# EAGLE board Platine final (EAGLE 9.7.0)
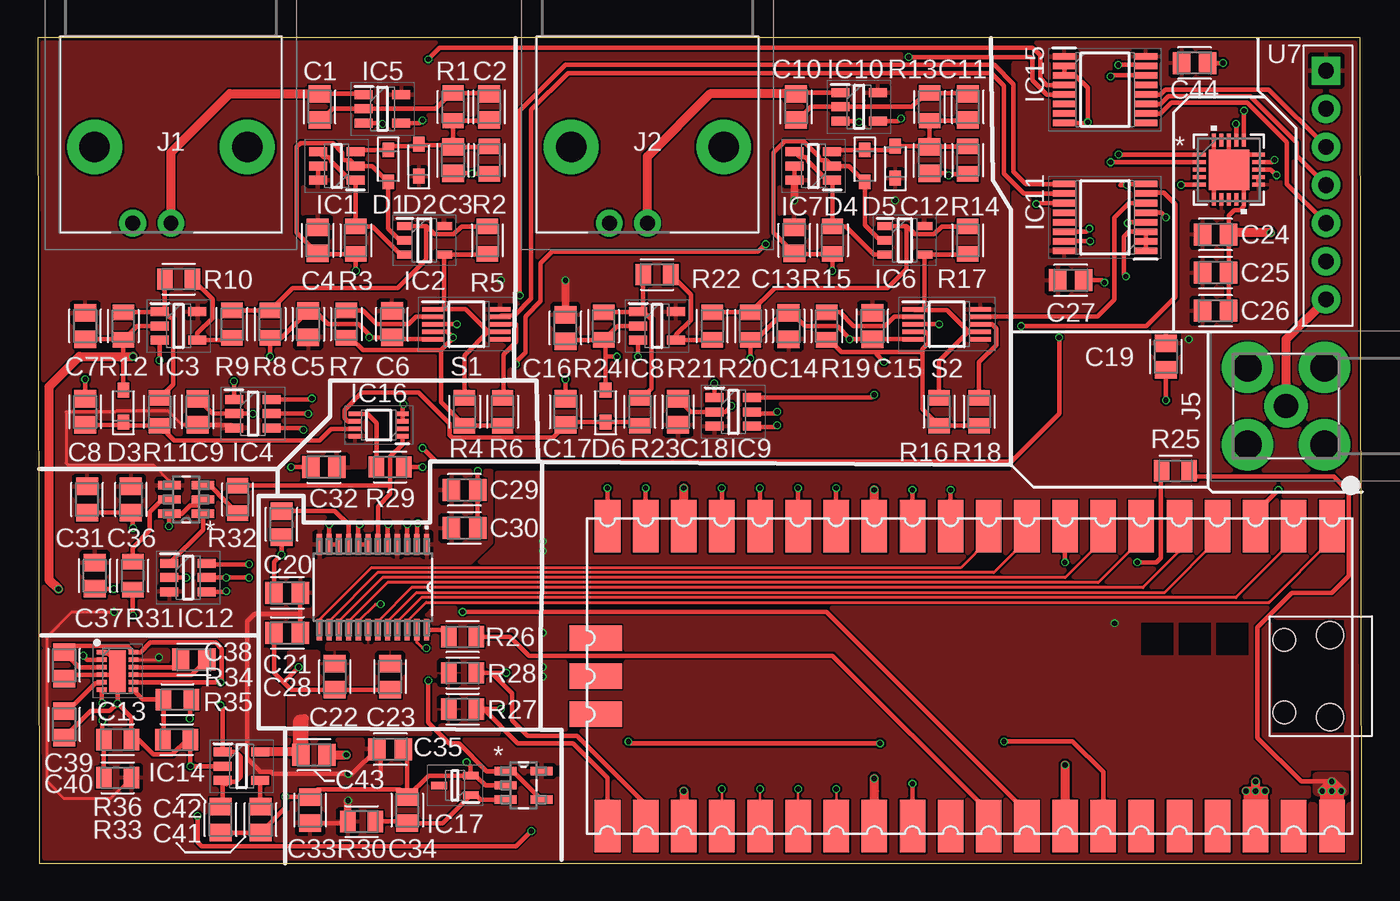
[diagram p0: board, top side]
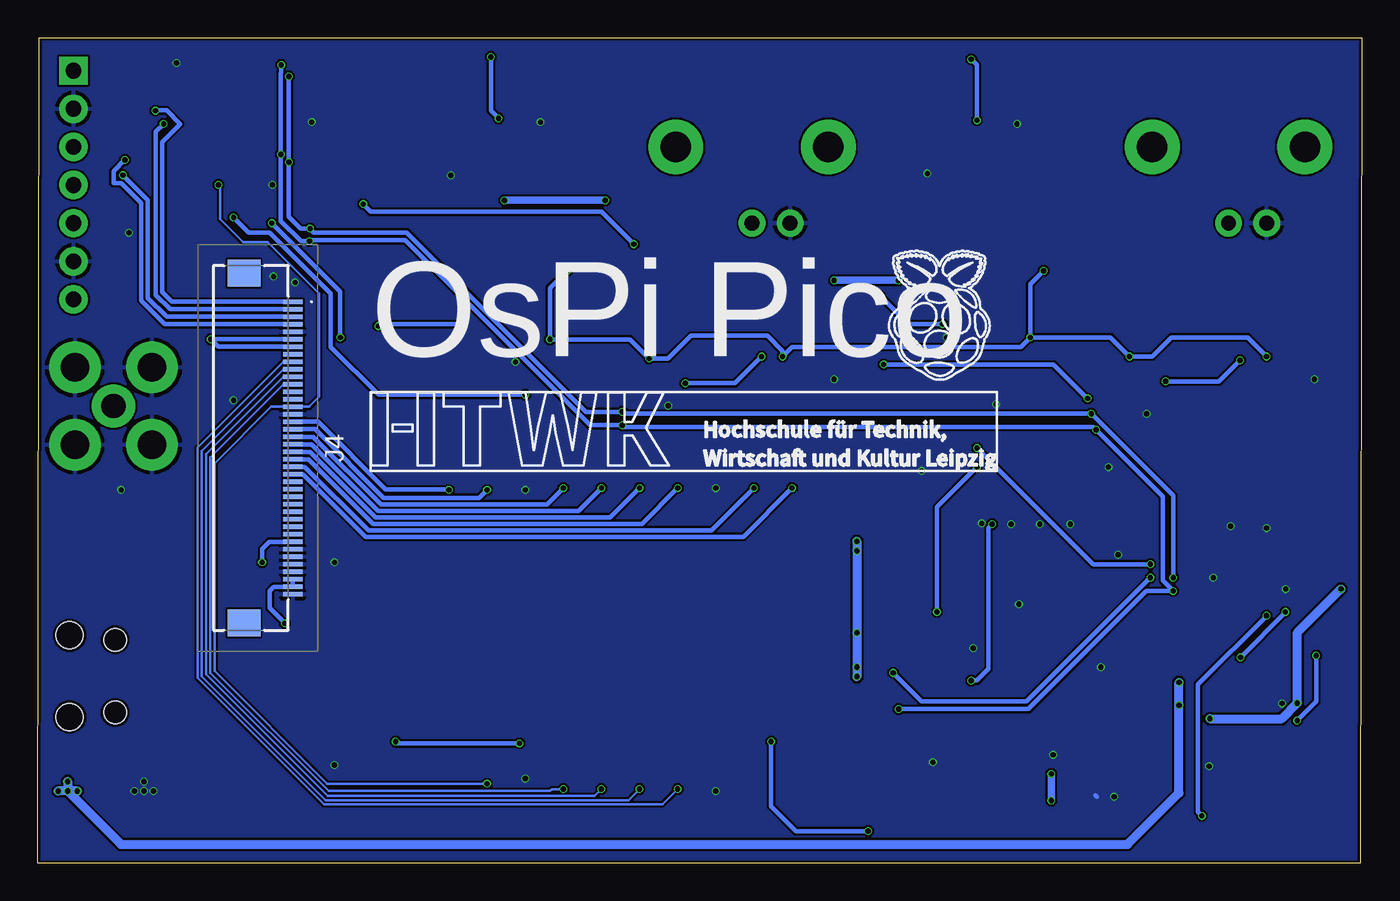
[diagram p1: board, bottom side, seen from below]

Size 88.25 x 55.04 mm. Coordinates in mm from the lower left corner, seen from the top.
Outline: 88.12,55.04 0,55.04 0.13,0 88.25,0 88.12,55.04
Copper layers (1*16): Top / Bottom
Stack-up Default Layer Stack: Top User Defined 0.035mm / Dielectric-1 User Defined 1.6mm / Bottom User Defined 0.035mm
Design rules: minimum copper width 5mil, minimum drill size 0.3mm, copper clearance wire_polygon to wire_polygon 5mil, copper clearance wire_polygon to pad_smd 5mil, copper clearance wire_polygon to via 5mil, copper clearance pad_smd to pad_smd 5mil, copper clearance pad_smd to via 5mil, copper clearance via to via 5mil, copper clearance smd to pad (same net) 5mil, copper clearance smd to via (same net) 5mil, copper clearance smd to smd (same net) 5mil, dimension clearance 0.2mm, restrict clearance 0mil, drill distance 6mil, keepout clearance 0mil

## Footprints (pad centres in the part's own frame; a part is rotated, then mirrored left to right if it is on the bottom)
CAPC2012X110 = smd 1.165 x 1.465: 1 -0.875,0; 2 0.875,0
SODFL2513X70 = smd 0.985 x 0.774: 1 -1.065,0; 2 1.065,0
SOT95P280X145-6N = smd 1.2 x 0.6: 1 -1.25,0.95; 2 -1.25,0; 3 -1.25,-0.95; 4 1.25,-0.95; 5 1.25,0; 6 1.25,0.95
SOT95P280X100-5N = smd 1.05 x 0.55: 1 -1.3,0.95; 2 -1.3,0; 3 -1.3,-0.95; 4 1.3,-0.95; 5 1.3,0.95
SOT95P280X145-5N = smd 1.2 x 0.6: 1 -1.25,0.95; 2 -1.25,0; 3 -1.25,-0.95; 4 1.25,-0.95; 5 1.25,0.95
SOP64P600X175-16N = smd 1.528 x 0.435: 1 -2.711,2.222; 2 -2.711,1.588; 3 -2.711,0.952; 4 -2.711,0.318; 5 -2.711,-0.318; 6 -2.711,-0.952; 7 -2.711,-1.588; 8 -2.711,-2.222; 9 2.711,-2.222; 10 2.711,-1.588; 11 2.711,-0.952; 12 2.711,-0.318; 13 2.711,0.318; 14 2.711,0.952; 15 2.711,1.588; 16 2.711,2.222
SON50P200X300X80-13N = smd 0.65 x 0.3: 1 -1.05,1.25; 2 -1.05,0.75; 3 -1.05,0.25; 4 -1.05,-0.25; 5 -1.05,-0.75; 6 -1.05,-1.25; 7 1.05,-1.25; 8 1.05,-0.75; 9 1.05,-0.25; 10 1.05,0.25; 11 1.05,0.75; 12 1.05,1.25 | smd 1.1 x 2.75: 13 0,0
SOP50P310X90-8N = smd 0.85 x 0.3: 1 -1.575,0.75; 2 -1.575,0.25; 3 -1.575,-0.25; 4 -1.575,-0.75; 5 1.575,-0.75; 6 1.575,-0.25; 7 1.575,0.25; 8 1.575,0.75
SOT65P210X110-3N = smd 1.05 x 0.5: 1 -1.05,0.65; 2 -1.05,-0.65; 3 1.05,0
731375003 = drill 0.99 pad 1.54: 1 0,0; 2 2.54,0 | drill 2.032: P$1 -5.08,-5.08; P$2 5.08,-5.08
F3051A7H111040E100 = smd 0.3 x 1.3: 1 -9.75,2.8; 2 -9.25,2.8; 3 -8.75,2.8; 4 -8.25,2.8; 5 -7.75,2.8; 6 -7.25,2.8; 7 -6.75,2.8; 8 -6.25,2.8; 9 -5.75,2.8; 10 -5.25,2.8; 11 -4.75,2.8; 12 -4.25,2.8; 13 -3.75,2.8; 14 -3.25,2.8; 15 -2.75,2.8; 16 -2.25,2.8; 17 -1.75,2.8; 18 -1.25,2.8; 19 -0.75,2.8; 20 -0.25,2.8; 21 0.25,2.8; 22 0.75,2.8; 23 1.25,2.8; 24 1.75,2.8; 25 2.25,2.8; 26 2.75,2.8; 27 3.25,2.8; 28 3.75,2.8; 29 4.25,2.8; 30 4.75,2.8; 31 5.25,2.8; 32 5.75,2.8; 33 6.25,2.8; 34 6.75,2.8; 35 7.25,2.8; 36 7.75,2.8; 37 8.25,2.8; 38 8.75,2.8; 39 9.25,2.8; 40 9.75,2.8 | smd 1.8 x 2.2: MP1 -11.65,-0.45; MP2 11.65,-0.45
PCBSMAFRAHT = drill 1.6 pad 2.4: 1 0,0 | drill 1.9 pad 2.85: 2 -2.575,2.575; 3 -2.575,-2.575; 4 2.575,-2.575; 5 2.575,2.575
RESC2012X65 = smd 1.031 x 1.42: 1 -0.919,0; 2 0.919,0
SOP50P490X110-10N = smd 1.45 x 0.3: 1 -2.225,1; 2 -2.225,0.5; 3 -2.225,0; 4 -2.225,-0.5; 5 -2.225,-1; 6 2.225,-1; 7 2.225,-0.5; 8 2.225,0; 9 2.225,0.5; 10 2.225,1
PICO-PKG-SMD = smd 3.5 x 1.7: P$1 -10,24.13; P$2 -10,21.59; P$3 -10,19.05; P$4 -10,16.51; P$5 -10,13.97; P$6 -10,11.43; P$7 -10,8.89; P$8 -10,6.35; P$9 -10,3.81; P$10 -10,1.27; P$11 -10,-1.27; P$12 -10,-3.81; P$13 -10,-6.35; P$14 -10,-8.89; P$15 -10,-11.43; P$16 -10,-13.97; P$17 -10,-16.51; P$18 -10,-19.05; P$19 -10,-21.59; P$20 -10,-24.13; P$21 10,-24.13; P$22 10,-21.59; P$23 10,-19.05; P$24 10,-16.51; P$25 10,-13.97; P$26 10,-11.43; P$27 10,-8.89; P$28 10,-6.35; P$29 10,-3.81; P$30 10,-1.27; P$31 10,1.27; P$32 10,3.81; P$33 10,6.35; P$34 10,8.89; P$35 10,11.43; P$36 10,13.97; P$37 10,16.51; P$38 10,19.05; P$39 10,21.59; P$40 10,24.13 | smd 1.7 x 3.5: P$41 -2.54,-24.925; P$42 0,-24.925; P$43 2.54,-24.925 | hole 1.8: -2.725,24; 2.725,24 | hole 1.5: -2.425,20.97; 2.425,20.97
MTC24 = smd 1.422 x 0.356: 1 -2.845,3.575; 2 -2.845,2.925; 3 -2.845,2.275; 4 -2.845,1.625; 5 -2.845,0.975; 6 -2.845,0.325; 7 -2.845,-0.325; 8 -2.845,-0.975; 9 -2.845,-1.625; 10 -2.845,-2.275; 11 -2.845,-2.925; 12 -2.845,-3.575; 13 2.845,-3.575; 14 2.845,-2.925; 15 2.845,-2.275; 16 2.845,-1.625; 17 2.845,-0.975; 18 2.845,-0.325; 19 2.845,0.325; 20 2.845,0.975; 21 2.845,1.625; 22 2.845,2.275; 23 2.845,2.925; 24 2.845,3.575
RTJ20_2P7X2P7 = smd 0.85 x 0.28: 1 -1.975,1; 2 -1.975,0.5; 3 -1.975,0; 4 -1.975,-0.5; 5 -1.975,-1; 11 1.975,-1; 12 1.975,-0.5; 13 1.975,0; 14 1.975,0.5; 15 1.975,1 | smd 0.28 x 0.85: 6 -1,-1.975; 7 -0.5,-1.975; 8 0,-1.975; 9 0.5,-1.975; 10 1,-1.975; 16 1,1.975; 17 0.5,1.975; 18 0,1.975; 19 -0.5,1.975; 20 -1,1.975 | smd 2.7 x 2.7: 21 0,0
DBV5 = smd 1.473 x 0.559: 1 -1.194,0.95; 2 -1.194,0; 3 -1.194,-0.95; 4 1.194,-0.95; 5 1.194,0.95
DBV6 = smd 1.473 x 0.559: 1 -1.118,0.95; 2 -1.118,0; 3 -1.118,-0.95; 4 1.118,-0.95; 5 1.118,0; 6 1.118,0.95
AD9833FUNCGEN = drill 1.05 square: P$1 0,0 | drill 1.05: P$2 0,-2.54; P$3 0,-5.08; P$4 0,-7.62; P$5 0,-10.16; P$6 0,-12.7; P$7 0,-15.24

## Placement (x,y rotation side)
C1  10n  [CAPC2012X110]  18.8,50.42 270 top
C2  1p  [CAPC2012X110]  30.1,50.42 270 top
C3  6.8p  [CAPC2012X110]  27.69,46.86 270 top
C4  100n  [CAPC2012X110]  18.67,41.53 270 top
C5  100n  [CAPC2012X110]  18.03,35.94 90 top
C6  100n  [CAPC2012X110]  23.62,35.94 270 top
C7  100n  [CAPC2012X110]  3.17,35.81 270 top
C8  160p  [CAPC2012X110]  3.17,30.1 90 top
C9  100n  [CAPC2012X110]  10.67,30.1 90 top
C10  10n  [CAPC2012X110]  50.55,50.42 270 top
C11  1p  [CAPC2012X110]  61.98,50.42 270 top
C12  6.8p  [CAPC2012X110]  59.44,46.86 270 top
C13  100n  [CAPC2012X110]  50.42,41.53 270 top
C14  100n  [CAPC2012X110]  50.04,35.81 90 top
C15  100n  [CAPC2012X110]  55.63,35.81 270 top
C16  100n  [CAPC2012X110]  35.17,35.69 270 top
C17  160p  [CAPC2012X110]  35.18,30.1 90 top
C18  100n  [CAPC2012X110]  42.67,30.1 90 top
C19  100n  [CAPC2012X110]  75.18,33.78 270 top
C20  100n  [CAPC2012X110]  16.26,22.61 270 top
C21  100n  [CAPC2012X110]  16.64,18.03 180 top
C22  100n  [CAPC2012X110]  19.81,12.45 270 top
C23  22u  [CAPC2012X110]  23.5,12.45 270 top
C24  100n  [CAPC2012X110]  78.49,39.37 0 top
C25  100n  [CAPC2012X110]  78.49,41.91 0 top
C26  1u  [CAPC2012X110]  78.49,36.83 0 top
C27  1u  [CAPC2012X110]  68.83,38.86 0 top
C28  100n  [CAPC2012X110]  16.64,15.37 180 top
C29  100n  [CAPC2012X110]  28.45,24.89 0 top
C30  22u  [CAPC2012X110]  28.45,22.35 0 top
C31  22u  [CAPC2012X110]  3.3,24.26 270 top
C32  100n  [CAPC2012X110]  19.08,26.42 180 top
C33  100n  [CAPC2012X110]  18.16,3.56 90 top
C34  100n  [CAPC2012X110]  24.64,3.56 90 top
C35  1u  [CAPC2012X110]  23.5,7.62 0 top
C36  100n  [CAPC2012X110]  6.22,24.26 270 top
C37  100n  [CAPC2012X110]  3.81,19.18 270 top
C38  2.2u  [CAPC2012X110]  10.41,13.59 0 top
C39  2.2u  [CAPC2012X110]  1.78,13.21 270 top
C40  4.7u  [CAPC2012X110]  1.78,9.27 270 top
C41  10n  [CAPC2012X110]  14.86,2.92 270 top
C42  1u  [CAPC2012X110]  12.19,2.92 270 top
C43  2.2u  [CAPC2012X110]  18.41,7.24 0 top
C44  1u  [CAPC2012X110]  77.09,53.34 0 top
D1  DIODE  [SODFL2513X70]  23.37,46.48 270 top
D2  DIODE  [SODFL2513X70]  25.4,46.86 90 top
D3  DIODE  [SODFL2513X70]  5.71,30.48 90 top
D4  DIODE  [SODFL2513X70]  55.12,46.48 270 top
D5  DIODE  [SODFL2513X70]  57.15,46.74 90 top
D6  DIODE  [SODFL2513X70]  37.85,30.48 90 top
IC1  OPA357AIDBVR  [SOT95P280X145-6N]  19.94,46.48 180 top
IC2  LT1818CS5#TRMPBF  [SOT95P280X100-5N]  25.78,41.53 0 top
IC3  OPA820IDBVR  [SOT95P280X145-5N]  9.4,35.81 0 top
IC4  DAC5571IDBVTG4  [SOT95P280X145-6N]  14.35,29.97 0 top
IC5  SN74LVC1G66DBVRE4  [SOT95P280X145-5N]  22.99,50.29 0 top
IC6  LT1818CS5#TRMPBF  [SOT95P280X100-5N]  57.78,41.53 0 top
IC7  OPA357AIDBVR  [SOT95P280X145-6N]  51.69,46.48 180 top
IC8  OPA820IDBVR  [SOT95P280X145-5N]  41.27,35.81 0 top
IC9  DAC5571IDBVTG4  [SOT95P280X145-6N]  46.35,30.1 0 top
IC10  SN74LVC1G66DBVRE4  [SOT95P280X145-5N]  54.74,50.42 0 top
IC11  TCA9554DBQR  [SOP64P600X175-16N]  71.12,43.05 180 top
IC12  DAC5571IDBVTG4  [SOT95P280X145-6N]  10.03,19.05 0 top
IC13  LM27762DSST  [SON50P200X300X80-13N]  5.33,12.83 0 top
IC14  LP2985-33DBVR  [SOT95P280X145-5N]  13.59,6.48 0 top
IC15  TCA9554DBQR  [SOP64P600X175-16N]  71.12,51.56 0 top
IC16  SN74LVC2G53DCUR  [SOP50P310X90-8N]  22.73,29.21 180 top
IC17  LM4040DELT-2.0  [SOT65P210X110-3N]  27.81,5.21 180 top
J1  73137-5003  [731375003]  8.89,42.67 180 top
J2  73137-5003  [731375003]  40.64,42.67 180 top
J4  F305-1A7H1-11040-E100  [F3051A7H111040E100]  74.04,27.69 270 bottom
J5  PCB.SMAFRA.HT  [PCBSMAFRAHT]  83.19,30.48 270 top
R1  680k  [RESC2012X65]  27.69,50.42 270 top
R2  100k  [RESC2012X65]  30.1,46.86 90 top
R3  1k  [RESC2012X65]  21.21,41.53 90 top
R4  100  [RESC2012X65]  28.45,30.1 90 top
R5  680  [RESC2012X65]  29.97,41.53 90 top
R6  100  [RESC2012X65]  30.99,30.1 90 top
R7  47  [RESC2012X65]  20.57,35.94 90 top
R8  1k  [RESC2012X65]  15.49,35.94 90 top
R9  100  [RESC2012X65]  12.95,35.94 270 top
R10  100  [RESC2012X65]  9.4,38.94 180 top
R11  100  [RESC2012X65]  8.13,30.1 270 top
R12  1k  [RESC2012X65]  5.71,35.81 90 top
R13  680k  [RESC2012X65]  59.44,50.42 270 top
R14  100k  [RESC2012X65]  61.98,46.86 90 top
R15  1k  [RESC2012X65]  52.96,41.53 90 top
R16  100  [RESC2012X65]  60.07,30.1 90 top
R17  680  [RESC2012X65]  61.98,41.53 90 top
R18  100  [RESC2012X65]  62.74,30.1 90 top
R19  47  [RESC2012X65]  52.58,35.81 90 top
R20  1k  [RESC2012X65]  47.5,35.81 90 top
R21  100  [RESC2012X65]  44.96,35.81 270 top
R22  100  [RESC2012X65]  41.27,39.24 180 top
R23  100  [RESC2012X65]  40.13,30.1 270 top
R24  1k  [RESC2012X65]  37.72,35.81 90 top
R25  22  [RESC2012X65]  75.82,26.16 180 top
R26  22  [RESC2012X65]  28.32,15.11 0 top
R27  4.7k  [RESC2012X65]  28.32,10.29 180 top
R28  4.7k  [RESC2012X65]  28.32,12.7 180 top
R29  22  [RESC2012X65]  23.5,26.42 180 top
R30  1k  [RESC2012X65]  21.59,2.79 180 top
R31  22  [RESC2012X65]  6.35,19.18 270 top
R32  1M  [RESC2012X65]  13.34,24.26 270 top
R33  87k  [RESC2012X65]  5.33,5.72 180 top
R34  87k  [RESC2012X65]  9.32,10.92 180 top
R35  50k  [RESC2012X65]  9.27,8.26 180 top
R36  50k  [RESC2012X65]  5.33,8.26 180 top
S1  ADG621BRMZ  [SOP50P490X110-10N]  28.57,35.94 0 top
S2  ADG621BRMZ  [SOP50P490X110-10N]  60.58,35.94 0 top
U1  RASPBERRY_PICOSMD  [PICO-PKG-SMD]  62.11,12.48 270 top
U3  ADC08100CIMTCMTC24  [MTC24]  22.35,18.41 270 top
U4  TSC2004IRTJRRTJ20_2P7X2P7  [RTJ20_2P7X2P7]  79.38,46.23 0 top
U5  TLV271CDBVRDBV5  [DBV5]  32.38,5.21 0 top
U6  TLV3501AIDBVRDBV6  [DBV6]  9.91,24.26 180 top
U7  AD9833FUNCGEN  [AD9833FUNCGEN]  85.85,52.83 0 top

## Library data of the parts
C1-C44 = Capacitor; CATEGORY: Capacitor
D1-D6 = Diode; CATEGORY: Diode; SUB-CATEGORY: Rectifier
IC1 IC7 = Bibliothek; ARROW_PART_NUMBER: OPA300AIDBVT; ARROW_PRICE-STOCK: https://www.arrow.com/en/products/opa300aidbvt/texas-instruments; DESCRIPTION: Texas Instruments OPA300AIDBVT Op Amp, 150MHz CMOS, Rail to Rail, 3 V, 5 V, 6-Pin SOT-23; HEIGHT: 1.45mm; MANUFACTURER_NAME: Texas Instruments; MANUFACTURER_PART_NUMBER: OPA300AIDBVT; MOUSER_PART_NUMBER: 595-OPA300AIDBVT; MOUSER_PRICE-STOCK: https://www.mouser.co.uk/ProductDetail/Texas-Instruments/OPA300AIDBVT?qs=7nS3%252BbEUL6t1esg%2FG6ny6A%3D%3D
IC2 IC6 = Bibliothek; DESCRIPTION: OP Amp Single Volt Fdbk +/-6.3V/12.6V Automotive 5-Pin TSOT-23 T/R; HEIGHT: 1mm; MANUFACTURER_NAME: Analog Devices; MANUFACTURER_PART_NUMBER: LT1818CS5#TRMPBF; MOUSER_PART_NUMBER: 584-LT1818CS5#TRMPBF; MOUSER_PRICE-STOCK: https://www.mouser.co.uk/ProductDetail/Analog-Devices/LT1818CS5TRMPBF?qs=ytflclh7QUVAYHHwzaOLfQ%3D%3D
IC3 IC8 = Bibliothek; ARROW_PART_NUMBER: OPA820IDBVR; ARROW_PRICE-STOCK: https://www.arrow.com/en/products/opa820idbvr/texas-instruments?region=nac; DESCRIPTION: Unity Gain Stable,Low Noise,Voltage Feedback Operational Amplifier; HEIGHT: 1.45mm; MANUFACTURER_NAME: Texas Instruments; MANUFACTURER_PART_NUMBER: OPA820IDBVR; MOUSER_PART_NUMBER: 595-OPA820IDBVR; MOUSER_PRICE-STOCK: https://www.mouser.co.uk/ProductDetail/Texas-Instruments/OPA820IDBVR?qs=wgAEGBTxy7nJk6xHGNzl%2Fw%3D%3D
IC4 IC9 IC12 = Bibliothek; ARROW_PART_NUMBER: DAC5571IDBVTG4; ARROW_PRICE-STOCK: https://www.arrow.com/en/products/dac5571idbvtg4/texas-instruments; DESCRIPTION: Digital to Analog Converters - DAC Low-power 8-Bit w/hi-speed I2C Input; HEIGHT: 1.45mm; MANUFACTURER_NAME: Texas Instruments; MANUFACTURER_PART_NUMBER: DAC5571IDBVTG4; MOUSER_PART_NUMBER: 595-DAC5571IDBVTG4; MOUSER_PRICE-STOCK: https://www.mouser.co.uk/ProductDetail/Texas-Instruments/DAC5571IDBVTG4?qs=vul0MlC%2Fa1dIXBAlKeMYTQ%3D%3D
IC5 IC10 = Bibliothek; ARROW_PART_NUMBER: SN74LVC1G66DBVRE4; ARROW_PRICE-STOCK: https://www.arrow.com/en/products/sn74lvc1g66dbvre4/texas-instruments; DESCRIPTION: Analogue Switch ICs Single Bilateral Analog Switch; HEIGHT: 1.45mm; MANUFACTURER_NAME: Texas Instruments; MANUFACTURER_PART_NUMBER: SN74LVC1G66DBVRE4; MOUSER_PART_NUMBER: 595-SN74LVC1G66DBVRE; MOUSER_PRICE-STOCK: https://www.mouser.co.uk/ProductDetail/Texas-Instruments/SN74LVC1G66DBVRE4?qs=PVVDbbWpW3KpmpL0QtM70g%3D%3D
IC11 IC15 = Bibliothek; DESCRIPTION: Remote 8-Bit I2C and SMBus I/O Expander; HEIGHT: 1.75mm; MANUFACTURER_NAME: Texas Instruments; MANUFACTURER_PART_NUMBER: TCA9554DBQR; MOUSER_PART_NUMBER: 595-TCA9554DBQR; MOUSER_PRICE-STOCK: https://www.mouser.co.uk/ProductDetail/Texas-Instruments/TCA9554DBQR?qs=MiqG6Kq1qKNgK3BiZWWJgA%3D%3D
IC13 = Bibliothek; ARROW_PART_NUMBER: LM27762DSST; ARROW_PRICE-STOCK: https://www.arrow.com/en/products/lm27762dsst/texas-instruments?region=nac; DESCRIPTION: Low-Noise Positive- and Negative-Output Charge Pump With Integrated LDO; HEIGHT: 0.8mm; MANUFACTURER_NAME: Texas Instruments; MANUFACTURER_PART_NUMBER: LM27762DSST; MOUSER_PART_NUMBER: 595-LM27762DSST; MOUSER_PRICE-STOCK: https://www.mouser.co.uk/ProductDetail/Texas-Instruments/LM27762DSST?qs=vcbl%252BK4rRlcgKmrBHASI8g%3D%3D
IC14 = LP2985-33DBVR; DESCRIPTION: 150-mA Low-noise Low-dropout Regulator With Shutdown; HEIGHT: 1.45mm; MANUFACTURER_NAME: Texas Instruments; MANUFACTURER_PART_NUMBER: LP2985-33DBVR; MOUSER_PART_NUMBER: 595-LP2985-33DBVR; MOUSER_PRICE-STOCK: https://www.mouser.co.uk/ProductDetail/Texas-Instruments/LP2985-33DBVR?qs=paYhMW8qfiswyUdMjD%2FxlQ%3D%3D
IC16 = Bibliothek; DESCRIPTION: Single Pole, Double-Throw (SPDT) Analog Switch or 2:1 Analog Multiplexer/Demultiplexer; HEIGHT: 0.9mm; MANUFACTURER_NAME: Texas Instruments; MANUFACTURER_PART_NUMBER: SN74LVC2G53DCUR; MOUSER_PART_NUMBER: 595-SN74LVC2G53DCUR; MOUSER_PRICE-STOCK: https://www.mouser.co.uk/ProductDetail/Texas-Instruments/SN74LVC2G53DCUR?qs=B7lSdIxWQklQg3lKHael0g%3D%3D
IC17 = Bibliothek; DESCRIPTION: Precision micropower shunt voltage reference; HEIGHT: 1.1mm; MANUFACTURER_NAME: STMicroelectronics; MANUFACTURER_PART_NUMBER: LM4040DELT-2.0
J1 J2 = Bibliothek; DESCRIPTION: Molex BNC Series Right Angle 50 PCB Mount Bulkhead Fitting BNC Connector, jack, Nickel, Through Hole Termination; HEIGHT: 13.2mm; MANUFACTURER_NAME: Molex; MANUFACTURER_PART_NUMBER: 73137-5003; MOUSER_PART_NUMBER: 538-73137-5003; MOUSER_PRICE-STOCK: https://www.mouser.co.uk/ProductDetail/Molex/73137-5003?qs=ldwB34exYZUMRxRXTNcLMQ%3D%3D
J4 = Bibliothek; DESCRIPTION: Flex Connector, 0.50mm Pitch, Height 2.00mm, Right angle, Flip type, 40 position, With MYLAR; HEIGHT: 2.2mm; MANUFACTURER_NAME: Amphenol Communications Solutions; MANUFACTURER_PART_NUMBER: F305-1A7H1-11040-E100; MOUSER_PART_NUMBER: 649-F3051A7H111040E1; MOUSER_PRICE-STOCK: https://www.mouser.co.uk/ProductDetail/Amphenol-Aorora/F305-1A7H1-11040-E100?qs=xZ%2FP%252Ba9zWqZ5RVHUctg7AQ%3D%3D
J5 = Bibliothek; DESCRIPTION: RF Connectors / Coaxial Connectors SMA RA PCB Mount, Jack, Gold, 50 , Through Hole Pin; HEIGHT: 9mm; MANUFACTURER_NAME: Taoglas; MANUFACTURER_PART_NUMBER: PCB.SMAFRA.HT; MOUSER_PART_NUMBER: 960-PCB.SMAFRA.HT; MOUSER_PRICE-STOCK: https://www.mouser.co.uk/ProductDetail/Taoglas/PCB.SMAFRA.HT?qs=RuW%2Fu%252BNMQmubIFYcN8w5Dw%3D%3D
R1-R36 = Resistor; CATEGORY: Resistor; SUB-CATEGORY: Fixed
S1 S2 = Bibliothek; DESCRIPTION: ADG621BRMZ, Analogue Switch Dual SPST, 3, 5V, 10-Pin, MSOP; HEIGHT: 1.1mm; MANUFACTURER_NAME: Analog Devices; MANUFACTURER_PART_NUMBER: ADG621BRMZ; MOUSER_PART_NUMBER: 584-ADG621BRMZ; MOUSER_PRICE-STOCK: https://www.mouser.co.uk/ProductDetail/Analog-Devices/ADG621BRMZ?qs=BpaRKvA4VqFq1opwvWkqjQ%3D%3D
U1 U7 = Bibliothek
U3 = Bibliothek; COPYRIGHT: Copyright (C) 2023 Ultra Librarian. All rights reserved.; MANUFACTURER_PART_NUMBER: ADC08100CIMTC; MFR_NAME: Texas Instruments; TYPE: ADC08100CIMTC
U4 = Bibliothek; COPYRIGHT: Copyright (C) 2023 Ultra Librarian. All rights reserved.; MANUFACTURER_PART_NUMBER: TSC2004IRTJR; MFR_NAME: Texas Instruments
U5 = Bibliothek; COPYRIGHT: Copyright (C) 2023 Ultra Librarian. All rights reserved.; MANUFACTURER_PART_NUMBER: TLV271CDBVR; MFR_NAME: Texas Instruments
U6 = Bibliothek; COPYRIGHT: Copyright (C) 2023 Ultra Librarian. All rights reserved.; MANUFACTURER_PART_NUMBER: TLV3501AIDBVR; MFR_NAME: Texas Instruments

## Nets
3V3(OUT): U1.P$36
+3.3V: C19.1 C22.1 C23.1 C24.1 C25.1 C26.1 C27.1 C43.1 C44.1 IC11.16 IC14.5 IC15.1 IC15.16 J4.6 J4.7 J4.38 J4.39 R27.2 R28.2 U3.18 U4.7 U4.11 U4.12 U7.P$1
+3.3VA: C4.1 C5.1 C6.1 C7.1 C9.1 C13.1 C14.1 C15.1 C16.1 C18.1 C21.1 C28.1 C29.1 C30.1 C31.1 C32.1 C33.1 C35.1 C36.1 C37.1 D2.1 D5.1 IC1.5 IC1.6 IC2.5 IC3.5 IC4.3 IC5.5 IC6.5 IC7.5 IC7.6 IC8.5 IC9.3 IC10.5 IC12.3 IC13.11 IC16.8 R30.2 R33.1 S1.10 S2.10 U3.1 U3.4 U3.12 U5.5 U6.4
+3.3VA1: C34.1 IC17.1 R30.1 U5.3
+5V: C39.1 C42.1 IC13.3 IC13.8 IC13.12 IC14.1 IC14.3 R25.1 U1.P$40
-3.3VA: C4.2 C5.2 C6.2 C7.2 C13.2 C14.2 C15.2 C16.2 D1.2 D3.2 D4.2 D6.2 IC1.2 IC2.2 IC3.2 IC6.2 IC7.2 IC8.2 IC13.6 R3.1 R8.1 R12.1 R15.1 R20.1 R24.1 R34.1 S1.5 S2.5
A00: IC4.6 IC11.11
A01: IC9.6 IC11.5
A02: IC11.4 IC12.6
ACDC1: IC5.4 IC15.4
ACDC2: IC10.4 IC15.5
CLK: R26.2 U1.P$31
CS: J4.9 U1.P$24
D0: U1.P$1 U3.22
D1: U1.P$2 U3.21
D2: U1.P$4 U3.20
D3: U1.P$5 U3.19
D4: U1.P$6 U3.16
D5: U1.P$7 U3.15
D6: U1.P$9 U3.14
D7: U1.P$10 U3.13
DB0: J4.17 U1.P$11
DB1: J4.18 U1.P$12
DB2: J4.19 U1.P$14
DB3: J4.20 U1.P$15
DB4: J4.21 U1.P$16
DB5: J4.22 U1.P$17
DB6: J4.23 U1.P$19
DB7: J4.24 U1.P$20
FSYNC: IC15.10 U7.P$5
FUNC_OUT: J5.1 U7.P$7
GND: C3.2 C8.2 C9.2 C12.2 C17.2 C18.2 C19.2 C20.2 C21.2 C22.2 C23.2 C24.2 C25.2 C26.2 C27.2 C28.2 C29.2 C30.2 C31.2 C32.2 C33.2 C34.2 C35.2 C36.2 C37.2 C39.2 C40.2 C41.2 C42.2 C43.2 C44.2 IC4.2 IC5.3 IC9.2 IC10.3 IC11.1 IC11.2 IC11.3 IC11.8 IC12.2 IC13.1 IC13.4 IC13.13 IC14.2 IC15.2 IC15.3 IC15.8 IC16.3 IC16.4 IC17.2 J1.2 J2.2 J4.5 J4.16 J4.34 J4.35 J4.36 J4.37 J4.40 J5.2 J5.3 J5.4 J5.5 R2.1 R4.1 R6.1 R7.1 R14.1 R16.1 R18.1 R19.1 R35.1 R36.1 S1.4 S2.4 U1.P$3 U1.P$8 U1.P$13 U1.P$18 U1.P$23 U1.P$28 U1.P$33 U1.P$38 U3.2 U3.5 U3.7 U3.8 U3.10 U3.11 U3.17 U3.23 U4.6 U4.10 U4.15 U4.18 U4.20 U4.21 U5.2 U6.2 U6.6 U7.P$2 U7.P$6
N$1: C1.1 IC5.1 J1.1
N$2: C1.2 C2.1 IC5.2 R1.1
N$3: C2.2 C3.1 D1.1 D2.2 IC1.3 R1.2 R2.2
N$4: R7.2 S1.2
N$5: IC2.4 R4.2 R5.1 S1.1 S1.7
N$6: IC2.1 R5.2 R8.2 R9.1
N$7: IC1.1 IC1.4 IC2.3 R3.2
N$8: R6.2 S1.8
N$9: IC3.4 R9.2 R10.1
N$10: IC3.1 R10.2 R11.1 R12.2
N$11: IC3.3 IC4.1
N$12: C10.1 IC10.1 J2.1
N$13: C10.2 C11.1 IC10.2 R13.1
N$14: C11.2 C12.1 D4.1 D5.2 IC7.3 R13.2 R14.2
N$15: IC6.4 R16.2 R17.1 S2.1 S2.7
N$16: IC6.1 R17.2 R20.2 R21.1
N$17: IC6.3 IC7.1 IC7.4 R15.2
N$18: R19.2 S2.2
N$19: R18.2 S2.8
N$20: IC8.4 R21.2 R22.1
N$21: IC8.1 R22.2 R23.1 R24.2
N$22: IC8.3 IC9.1
N$23: R31.1 U6.5
N$24: R32.2 U6.3
N$25: IC12.1 U6.1
N$26: C20.1 U3.9
N$27: J4.33 R25.2
N$28: C40.1 IC13.5
N$29: IC13.2 R33.2 R36.2
N$30: C41.1 IC14.4
N$31: IC13.7 R34.2 R35.2
N$32: C38.1 IC13.10
N$33: C38.2 IC13.9
N$37: IC16.5 R29.2
N$39: R26.1 U3.24
RD: J4.12 U1.P$27
RS: J4.10 U1.P$25
RST: J4.15 U1.P$29 U4.5
SCL: IC4.5 IC9.5 IC11.14 IC12.5 IC15.14 R28.1 U1.P$22 U4.2
SCLK: IC15.11 U7.P$4
SDA: IC4.4 IC9.4 IC11.15 IC12.4 IC15.15 R27.1 U1.P$21 U4.1
SDATA: IC15.12 U7.P$3
SEL: R29.1 U1.P$32
SEL0: IC11.10 S1.9
SEL1: IC11.9 S1.3
SEL2: IC11.6 S2.9
SEL3: IC11.7 S2.3
SWGND: U1.P$42
TRIG: R31.2 U1.P$34
VIN: IC16.1 R32.1 U3.6
VINA: C8.1 D3.1 IC16.7 R11.2
VINB: C17.1 D6.1 IC16.6 R23.2
VREF: U3.3 U5.1 U5.4
VSYS: U1.P$39
WR: J4.11 U1.P$26
X+: J4.3 U4.13
X-: J4.1 U4.16
Y+: J4.4 U4.14
Y-: J4.2 U4.17

## Tracks (layer width: path | path; a pad name or v marks a point on that pad's centre or on a via)
+3.3V  (via drill 0.35)
  Top 0.305: U4.12 U4.11
  Top 0.61: IC14.5 17.35,7.43 C43.1 | 17.54,9.41 17.78,9.65
  Top 1.016: C43.1 17.54,9.41
  Bottom 0.305: 76.7,34.94 J4.6 | 76.7,34.94 v76.71,34.92 | J4.7 76.2,34.44 76.7,34.94 | 71.28,18.48 J4.39 | J4.39 J4.38 | J4.39 72.5,18.44 72.77,18.16 72.77,17.02 v71.75,16
  Bottom 0.61: v33.66,21.46 v33.66,20.83 v33.66,15.37 v33.66,13.08 v33.66,12.45
  pour Top (rank 3): 64.77,54.99 64.77,0.13 88.27,0.13 88.27,54.99
  pour Top (rank 3): 88.27,26.42 88.27,0.13 0.25,0.13 0.25,26.42
+3.3VA  (via drill 0.35)
  Top 0.203: IC13.11 6.39,13.57 7.92,13.57 v8.09,13.73 | C9.1 9.63,29.22 8.72,30.14 5.23,30.14 5.2,30.1 1.91,30.1 1.91,26.67 2.03,26.54 7.75,26.54 8.79,25.5 U6.4 | R33.1 4.86,4.32 1.78,4.32 0.64,5.46 0.64,15.11 2.29,16.76 v5.11,16.76
  Top 0.305: IC1.5 IC1.6 18.67,45.51 | IC7.6 IC7.5 | R30.2 20.56,2.68 C33.1 | C9.1 12.9,29.22 IC4.3 | 22.86,5.84 22.86,7.38 C35.1 20.97,5.97 v20.7,5.97 15.69,5.97 15.55,6.11 14.86,6.11 13.96,7.01 13.96,16.12 14.48,16.64 17.51,16.64 | C21.1 17.51,16.64 | 17.51,16.64 C28.1
  Top 0.508: C16.1 v35.17,38.85 v35.18,38.86 | IC7.6 50.44,44.22 v50.42,44.2 | R30.2 20.67,4.16 v20.7,4.19
  Bottom 0.305: v8.09,13.73 5.11,16.72 v5.11,16.76
  Bottom 0.508: v35.18,38.86 v30.86,38.86 | v50.42,44.2 v57.15,44.2 | v20.7,4.19 v20.7,5.97
  pour Top (rank 2): 0.13,54.99 0.13,26.29 64.77,26.29 64.77,54.99
  pour Top (rank 2): 30.35,26.29 30.35,21.34 25.78,16.76 19.05,16.76 19.05,14.35 0.25,14.35 0.25,26.29
  pour Top (rank 2): 0.25,14.35 0.25,0.13 34.8,0.13 34.8,8.38 16.51,8.38 16.51,14.35
+3.3VA1
  Top 0.305: R30.1 24.52,2.79 C34.1 26.99,2.68 IC17.1 28.88,4.57 29.21,4.57 29.52,4.26 U5.3
+5V  (via drill 0.35)
  Top 0.305: IC13.3 2.78,13.08 C39.1 2.2,14.51 5.97,14.51 6.38,14.1 IC13.12 6.86,14.08 7.51,14.73 11.86,14.73 12.28,14.31 12.28,12.08 12.18,12.08 | IC13.8 12.18,12.08 | 12.18,12.08 v12.19,12.07 | v12.19,10.54 12.34,10.39 IC14.1 13.21,7.43 13.53,7.11 13.53,5.78 13.19,5.44 12.43,5.44 | 12.43,5.44 IC14.3 12.34,3.94 C42.1 | 12.43,5.44 12.6,5.26 | v86.23,5.46 84.2,5.46 81.28,8.38 81.28,15.75 83.57,18.03 86.23,18.03 87.38,19.18 87.38,24.77 86.36,25.78 77.12,25.78 R25.1
  Top 0.61: v86.23,4.83 86.23,2.92 | U1.P$40 86.23,2.54 85.72,3.05 85.72,4.7 v85.6,4.83 | U1.P$40 | v86.87,4.83 86.74,4.7 86.74,2.99 U1.P$40 | v85.6,4.83 v86.87,4.83 | v85.6,4.83 v86.23,5.46 v86.87,4.83
  Bottom 0.61: v12.19,12.07 v12.19,10.54 12.19,4.7 15.62,1.27 82.68,1.27 v86.23,4.83 | v85.6,4.83 v86.23,4.83 | v86.23,4.83 v86.87,4.83 | v86.23,5.46 v86.23,4.83
  pour Top: 84.96,4.19 87.38,4.19 87.38,6.1 84.96,6.1
-3.3VA  (via drill 0.35)
  Top 0.305: IC2.2 24.13,41.53 23.37,42.29 D1.2 22.3,46.48 IC1.2 20.82,46.85 20.47,46.85 20.31,47.02 20.31,47.38 19.68,48.01 17.53,48.01 17.27,47.75 17.27,42.05 C4.2 18.71,40.61 R3.1 v21.21,39.5 | S1.5 23.75,34.94 C6.2 23.61,35.05 v22.1,35.05 22.1,35.25 21.4,35.94 19.37,35.94 18.5,36.82 C5.2 16.24,35.02 R8.1 v15.49,33.78 | R12.1 6.6,35.78 6.6,35.81 IC3.2 | D3.2 5.71,33.78 | 5.71,33.78 v6.35,33.78 | v52.96,39.5 R15.1 50.46,40.61 C13.2 49.02,42.05 49.02,47.37 49.78,48.13 51.03,48.13 52.06,47.11 52.06,47.02 52.22,46.85 52.57,46.85 IC7.2 54.05,46.48 D4.2 55.12,42.55 56.13,41.53 IC6.2 | S2.5 C15.2 54.12,34.94 v54.1,34.92 54.1,34.99 53.28,35.81 51.12,35.81 50.24,36.69 C14.2 49.66,36.69 47.86,34.89 R20.1 v47.5,33.66 | R24.1 38.64,35.81 IC8.2 | R24.1 35.25,34.89 C16.2 | D6.2 37.85,33.78 | 37.85,33.78 37.85,34.77 R24.1 | 37.85,33.78 v38.61,33.78 | 2.79,33.78 5.71,33.78 | IC13.6 4.28,10.73 v4.32,10.69 | R34.1 10.16,10.84 10.16,9.68 v10.14,9.65 | 5.71,33.78 R12.1 | C7.2 5.67,34.94 R12.1
  Top 0.61: v1.4,18.29 0.76,18.92 0.76,31.75 2.79,33.78 v6.35,33.78
  Bottom 0.305: v21.21,39.5 22.1,38.61 v22.1,35.05 | v6.35,33.78 7.62,35.05 12.7,35.05 13.97,33.78 v15.49,33.78 16.76,35.05 v22.1,35.05 | v52.96,39.5 54.1,38.35 v54.1,34.92 48.77,34.92 v47.5,33.66 46.23,33.66 44.7,35.18 39.62,35.18 38.61,34.16 v38.61,33.78 37.97,34.42 22.73,34.42 v22.1,35.05
  Bottom 0.61: v10.14,9.65 5.36,9.65 v4.32,10.69 4.29,10.71 4.29,15.39 v1.4,18.29
A00  (via drill 0.35)
  Top 0.305: IC4.6 18.22,30.92 v18.29,30.99 | v66.55,43.94 66.61,44 IC11.11 | v31.88,33.25 31.88,33.4 32.51,34.04 32.51,36.45 33.53,37.47 33.53,40 34.29,40.77 48.01,40.77 v48.51,41.28
  Bottom 0.305: v48.51,41.28 50.67,43.43 66.04,43.43 v66.55,43.94 | v18.29,30.99 20.55,33.25 v31.88,33.25
A01  (via drill 0.35)
  Top 0.305: IC11.5 74.87,43.37 v75.18,43.05 | v55.75,31.24 55.56,31.05 IC9.6
  Bottom 0.305: v55.75,31.24 65.53,31.24 68.71,34.42 68.71,37.97 72.77,42.04 74.17,42.04 v75.18,43.05
A02  (via drill 0.35)
  Top 0.305: IC11.4 72.71,42.73 v72.64,42.67 | v68.07,35.05 68.07,29.97 64.9,26.8 26.54,26.8 v25.65,27.69 | v14.1,19.94 11.34,19.94 IC12.6
  Bottom 0.305: v72.64,42.67 68.07,38.1 v68.07,35.05 | v25.65,27.69 17.91,19.94 v14.1,19.94
ACDC1  (via drill 0.35)
  Top 0.305: IC5.4 25.47,49.34 v25.65,49.53 | v26.04,53.59 26.8,54.36 66.29,54.36 66.8,53.85 66.8,52.32 67.25,51.88 IC15.4
  Bottom 0.305: v26.04,53.59 25.65,53.21 v25.65,49.53
ACDC2  (via drill 0.35)
  Top 0.305: IC10.4 57.34,49.47 v57.53,49.66 | v58.04,53.74 66.14,53.74 66.29,53.59 66.29,52.2 67.25,51.24 IC15.5
  Bottom 0.305: v58.04,53.74 58.04,50.17 v57.53,49.66
CLK
  Top 0.305: U1.P$31 63.49,2.59 63.49,3.33 52.98,13.84 32.77,13.84 31.5,15.11 R26.2
CS  (via drill 0.35)
  Top 0.152: U1.P$24 v45.6,4.95
  Top 0.305: U1.P$24
  Bottom 0.152: J4.9 71.85,33.44 77.57,27.71 77.57,12.36 69.16,3.94 46.61,3.94 v45.6,4.95
D0
  Top 0.203: 86.24,21.58 82.06,17.4 25.89,17.4 25.58,17.09 24.63,16.13 U3.22
  Top 0.305: 86.24,21.58 U1.P$1
D1
  Top 0.203: 83.7,21.58 79.85,17.73 25.57,17.73 23.98,16.13 U3.21
  Top 0.305: U1.P$2 83.7,21.58
D2
  Top 0.203: 78.62,21.58 75.1,18.06 25.25,18.06 23.33,16.13 U3.20
  Top 0.305: 78.62,21.58 U1.P$4
D3
  Top 0.203: U3.19 22.68,16.13 24.93,18.39 73.65,18.39 76.08,20.82
  Top 0.305: U1.P$5 76.08,20.82
D4
  Top 0.203: 73.54,21.58 70.68,18.72 23.31,18.72 20.73,16.13 U3.16
  Top 0.305: U1.P$6 73.54,21.58
D5
  Top 0.203: 71,21.58 68.47,19.05 23,19.05 20.08,16.13 U3.15
  Top 0.305: U1.P$7 71,21.58
D6
  Top 0.203: U3.14 19.43,16.13 22.68,19.38 63.72,19.38 65.92,21.58
  Top 0.305: U1.P$9 65.92,21.58
D7
  Top 0.203: U3.13 18.78,16.25 22.24,19.71 46.99,19.71 61.51,19.71 63.38,21.58
  Top 0.305: U1.P$10 63.38,21.58
DB0  (via drill 0.35)
  Top 0.305: U1.P$11 v60.83,24.89
  Bottom 0.305: v60.83,24.89 60.86,24.92 65.04,24.92 69.55,29.44 J4.17
DB1  (via drill 0.35)
  Top 0.305: U1.P$12 v58.3,24.89 v58.29,24.89
  Bottom 0.305: v58.29,24.89 58.82,24.36 65.18,24.36 69.75,28.94 J4.18
DB2  (via drill 0.35)
  Top 0.305: U1.P$14 v53.21,25.02
  Bottom 0.305: v53.21,25.02 54.3,23.93 65.36,23.93 69.87,28.44 J4.19
DB3  (via drill 0.35)
  Top 0.305: U1.P$15 v50.67,25.02
  Bottom 0.305: v50.67,25.02 52.19,23.5 65.54,23.5 69.98,27.94 J4.20
DB4  (via drill 0.35)
  Top 0.305: U1.P$16 v48.14,25.01 v48.13,25.02
  Bottom 0.305: v48.13,25.02 50.09,23.07 65.72,23.07 70.09,27.44 J4.21
DB5  (via drill 0.35)
  Top 0.305: U1.P$17 v45.6,25.01 v45.59,25.02
  Bottom 0.305: v45.59,25.02 47.98,22.63 65.9,22.63 70.2,26.94 J4.22
DB6  (via drill 0.35)
  Top 0.305: U1.P$19 v40.52,25.01 v40.51,25.02
  Bottom 0.305: v40.51,25.02 43.33,22.2 66.2,22.2 70.44,26.44 J4.23
DB7  (via drill 0.35)
  Top 0.305: U1.P$20 v37.98,25.01 v37.97,25.02
  Bottom 0.305: v37.97,25.02 41.22,21.77 66.38,21.77 70.55,25.94 J4.24
FSYNC
  Top 0.305: U7.P$5 83.25,45.28 83.25,48.06 80.61,50.7 75.53,50.7 74.81,49.97 IC15.10
FUNC_OUT
  Top 0.61: U7.P$7 83.19,34.92 J5.1
GND  (via drill 0.35)
  Top 0.203: v22.86,17.27 22.52,17.27 21.38,16.13 U3.17 | U3.23 25.28,14.73 25.65,14.35 v25.91,14.35
  Top 0.305: IC5.3 22.92,49.34 v22.99,49.28 | R2.1 30.07,45.97 v28.96,45.97 28.94,45.99 C3.2 | S1.4 27.3,35.44 v27.69,35.05 27.69,35.01 26.88,34.2 | R7.1 20.87,35.02 21.69,34.2 26.88,34.2 | R6.1 R4.1 26.88,30.74 26.88,34.2 | C8.2 v3.17,32.26 | v14.35,29.97 IC4.2 11.67,29.97 C9.2 | IC10.3 54.67,49.47 v54.74,49.4 | R14.1 60.8,45.94 v60.71,45.85 60.56,45.99 C12.2 | R19.1 52.75,34.89 53.56,34.08 55.88,34.08 | 58.97,34.08 55.88,34.08 | R18.1 R16.1 58.97,30.28 58.97,34.08 | C17.2 v35.18,32.26 | C18.2 43.55,30.1 IC9.2 45.82,30.1 v46.23,30.5 | IC15.2 IC15.3 69.16,52.5 69.98,51.69 v69.98,49.4 69.91,49.34 IC15.8 | IC11.1 IC11.2 IC11.3 72.71,42.1 72.39,41.78 72.39,39.24 v72.52,39.12 | IC11.8 72.2,45.28 72.14,45.21 v72.6,45.21 | C44.2 v78.99,53.34 | 58.97,34.08 58.97,34.29 59.36,34.67 59.36,35.21 59.12,35.44 S2.4 | C27.2 70.94,38.86 v71.09,38.71 | 55.88,34.08 55.88,33.93 v56.39,33.42 | IC16.3 IC16.4 24.31,30.53 v24.38,30.61 | C32.2 v16.89,26.42 | U3.10 U3.11 v19.43,22.6 v19.43,22.61 | U3.7 U3.8 21.38,22.52 v21.46,22.61 | U3.5 23.33,22.56 v23.37,22.61 | IC12.2 v9.91,19.05 | U6.2 10.63,23.87 10.17,23.87 9.61,23.31 U6.6 8.79,22.5 v8.76,22.48 | v6.35,22.35 6.35,23.25 C36.2 C31.2 | C37.2 5.07,18.3 v5.08,18.29 | C20.2 v16.26,20.57 15.76,20.08 C21.2 | C30.2 C29.2 29.32,26.15 v29.34,26.16 | C23.2 C22.2 16.89,11.57 16.39,12.07 | 16.39,12.07 15.76,12.7 C28.2 | C34.2 24.13,4.94 18.67,4.94 C33.2 16.52,4.43 v16.51,4.45 16.51,3.7 C41.2 C42.2 | C34.2 24.64,7.6 C35.2 | IC13.13 5.08,12.58 IC13.4 2.29,12.58 2.05,12.33 C39.2 | IC13.13 v5.33,10.67 | IC13.1 4.35,14.01 4.72,14.01 5.33,13.4 IC13.13 | v5.33,10.67 6.25,9.75 R36.1 6.73,8.26 7.72,7.27 8.98,7.27 9.97,8.26 R35.1 v10.18,6.48 IC14.2
  Top 0.305: C40.2 3.54,10.16 4.83,10.16 v5.33,10.67 | v25.33,22.66 25.28,22.61 U3.2 | U4.18 U4.21 | U4.6 78.38,45.23 U4.21 | 79.44,46.17 80.38,45.23 U4.10 80.38,43.79 80.13,43.55 79.73,43.55 79.36,43.18 C25.2 C24.2 C26.2 | 79.44,46.17 U4.21 | U4.15 80.5,47.23 79.44,46.17 | U1.P$3 81.16,23.37 v82.68,24.89 | U4.20 78.38,47.23 U4.21 | 16.39,12.07 v17.4,13.08 | U1.P$8 v68.46,20.07 v68.45,20.07 | C19.2 v75.18,30.86 | IC17.2 29.2,5.86 29.84,5.21 U5.2 | IC17.2 26.06,5.86 C34.2 | IC17.2 28.86,6.47 v28.59,6.74
  Top 0.61: U1.P$38 v81.16,4.82 v81.15,4.83 v81.15,5.46 | U1.P$38 80.65,2.99 80.65,4.69 v80.52,4.83 v81.79,4.83 81.66,4.7 81.66,2.98 U1.P$38 | C43.2 v20.57,7.24 | U1.P$23 v43.06,4.82 v43.05,4.83 | U1.P$28 55.76,4.82 | 55.75,4.83 55.76,4.82 | U1.P$18 v43.06,25.01 v43.05,25.02 | U1.P$13 v55.76,24.89 v55.75,24.89 | v82.15,42.04 79.49,42.04 C25.2 | 55.76,4.82 v55.76,5.66 v55.75,5.66 | U1.P$33 v68.47,6.55
  Bottom 0.305: 17.65,4.45 17.75,4.54
  pour Bottom: 0.13,54.99 88.27,54.99 88.27,0.13 0.13,0.13
N$1
  Top 0.305: C1.1 21.68,51.29 IC5.1
  Top 0.61: C1.1 18.78,51.31 12.8,51.31 8.89,47.39 J1.1
N$2
  Top 0.305: C1.2 18.92,49.54 19.67,50.29 IC5.2 26.51,50.29 27.56,51.34 R1.1 30.05,51.34 C2.1
N$3
  Top 0.305: C2.2 30.05,49.5 R1.2 C3.1 | R2.2 30.05,47.74 C3.1 | C3.1 27.56,47.86 25.46,47.86 D2.2 25.27,47.8 23.62,47.8 D1.1 21.3,47.55 IC1.3
N$4
  Top 0.305: S1.2 25.21,36.44 24.72,35.95 22.59,35.95 21.69,36.86 R7.2
N$5
  Top 0.305: S1.1 26.37,36.96 27.08,36.96 | 27.08,36.96 28.51,36.96 30.03,35.44 | 30.03,35.44 S1.7 | 27.08,36.96 IC2.4 29.94,40.58 R5.1 | 30.03,35.44 28.45,33.86 R4.2
N$6
  Top 0.305: IC2.1 25.89,42.48 | 25.89,42.48 26.44,41.92 27.72,41.92 28.25,42.45 R5.2 | R9.1 R8.2 16.99,38.35 24,38.35 25.89,40.24 25.89,42.48
N$7
  Top 0.305: IC1.4 19.06,47.06 19.41,47.06 19.57,46.9 19.57,46.81 20.84,45.53 IC1.1 21.21,45.51 R3.2 22.32,42.45 24.19,40.58 IC2.3
N$8
  Top 0.305: R6.2 31.05,31.09 31.05,33.92 31.88,34.75 31.88,35.94 S1.8
N$9
  Top 0.305: R9.2 12.83,34.89 10.68,34.89 IC3.4 10.65,35.34 11.65,36.35 11.65,37.6 R10.1
N$10
  Top 0.305: 8.48,36.76 IC3.1 8.12,36.73 R12.2 | 8.48,36.76 R10.2 | 8.48,36.76 8.85,36.39 8.86,36.39 9.03,36.23 9.03,31.92 R11.1
N$11  (via drill 0.35)
  Top 0.305: IC3.3 8.15,33.55 v8.13,33.53 | v13.08,32.13 13.1,32.11 IC4.1
  Bottom 0.305: v8.13,33.53 9.53,32.13 v13.08,32.13
N$12
  Top 0.305: IC10.1 50.62,51.37 C10.1
  Top 0.61: J2.1 40.64,47.12 44.82,51.29 C10.1
N$13
  Top 0.305: C10.2 50.67,49.54 51.55,50.42 IC10.2 58.26,50.42 59.18,51.34 R13.1 61.93,51.34 C11.1
N$14
  Top 0.305: C11.2 61.93,49.5 R13.2 C12.1 | C12.1 59.37,47.8 D5.2 56.9,47.55 D4.1 53.05,47.55 IC7.3 | R14.2 61.95,47.75 C12.1
N$15
  Top 0.305: R17.1 61.95,40.58 IC6.4 59.09,36.9 59.05,36.87 | R16.2 60.07,33.48 62.03,35.44 | S2.7 62.03,35.44 | S2.1 58.42,36.87 59.05,36.87 | 62.03,35.44 62.02,35.44 60.59,36.87 59.05,36.87
N$16
  Top 0.305: IC6.1 57.89,42.48 | 57.89,42.48 58.44,41.92 59.73,41.92 60.25,42.45 R17.2 | 57.89,42.48 57.89,39.6 56.64,38.35 49.12,38.35 R20.2 R21.1
N$17
  Top 0.305: IC7.4 50.81,47.06 51.16,47.06 51.32,46.9 51.32,46.81 52.59,45.53 IC7.1 52.96,45.51 R15.2 53.85,42.45 55.72,40.58 IC6.3
N$18
  Top 0.305: S2.2 57.09,36.44 56.47,35.83 54.37,35.83 53.47,36.73 R19.2
N$19
  Top 0.305: R18.2 62.74,33.4 63.88,34.54 63.88,35.63 63.57,35.94 S2.8
N$20
  Top 0.305: 42.56,34.89 R21.2 | 42.56,34.89 IC8.4 | 42.56,34.89 42.56,35.25 43.53,36.22 43.53,37.91 R22.1
N$21
  Top 0.305: R22.2 40.35,36.76 IC8.1 | IC8.1 39.99,36.73 R24.2 | IC8.1 40.03,36.77 40.36,36.77 40.9,36.23 40.9,31.66 40.26,31.02 R23.1
N$22  (via drill 0.35)
  Top 0.305: IC8.3 40.02,33.8 v40.01,33.78 | IC9.1 45.1,31.98 v45.09,32
  Bottom 0.305: v45.09,32 41.78,32 v40.01,33.78
N$23
  Top 0.305: U6.5 8.78,24.25 8.32,24.25 7.49,23.42 7.49,22.18 6.35,21.04 R31.1
N$24
  Top 0.305: R32.2 12.04,24.63 12.04,24.65 11.48,25.21 U6.3
N$25
  Top 0.305: U6.1 11.02,22.24 IC12.1
N$26
  Top 0.305: U3.9 20.73,22.58 19.81,23.5 17.78,23.5 17.4,23.5 16.27,23.5 C20.1
N$27  (via drill 0.35)
  Top 0.305: v73.28,20.07 74.55,20.07 74.83,20.35 74.83,26.09 R25.2
  Bottom 0.305: J4.33 72.8,21.44 73.28,20.95 v73.28,20.07
N$28
  Top 0.305: IC13.5 4.22,12.01 3.85,12.01 1.98,10.15 C40.1
N$29  (via drill 0.35)
  Top 0.305: IC13.2 3.31,13.58 v3.05,13.84 | v4.32,9.52 4.32,8.35 R36.2 R33.2
  Bottom 0.305: v3.05,13.84 3.05,10.8 v4.32,9.52
N$30
  Top 0.305: IC14.4 14.84,3.82 C41.1
N$31
  Top 0.305: IC13.7 7.02,10.94 8.38,10.94 R34.2 8.4,8.31 R35.2
N$32
  Top 0.305: C38.1 9.54,13.32 9.29,13.08 IC13.10
N$33
  Top 0.305: IC13.9 7.7,12.58 | 7.7,12.58 | 7.7,12.58 10.28,12.58 C38.2
N$37
  Top 0.305: IC16.5 21.98,29.96 22.61,29.34 22.61,26.45 R29.2
N$39
  Top 0.305: U3.24 27.4,15.57 R26.1
RD  (via drill 0.35)
  Top 0.152: U1.P$27 v53.22,4.95
  Top 0.305: U1.P$27
  Bottom 0.152: J4.12 71.85,31.94 76.73,27.05 76.73,12.71 68.85,4.83 54.1,4.83 53.98,4.95 v53.22,4.95
RS  (via drill 0.35)
  Top 0.152: U1.P$25 v48.14,4.95
  Bottom 0.152: J4.10 71.85,32.94 77.29,27.49 77.29,12.47 69.04,4.22 48.87,4.22 v48.14,4.95
RST  (via drill 0.35)
  Top 0.305: v76.2,45.21 76.22,45.23 U4.5 | v58.29,5.31 v58.3,5.31 U1.P$29
  Bottom 0.152: v58.29,5.31 68.94,5.31 76.45,12.83 76.45,26.67 72.69,30.44 J4.15 70.15,30.44 69.47,31.11 69.47,37.97 72.9,41.4 74.55,41.4 76.07,42.93 76.07,45.09 v76.2,45.21
SCL  (via drill 0.35)
  Top 0.305: IC9.5 47.73,29.97 49.15,29.97 v49.28,30.1 | v71.5,52.45 71.56,52.51 IC15.14 | v70.09,42.31 69.88,42.1 IC11.14 | IC4.5 v18.03,29.97 | IC12.5 v12.57,19.05 v14.1,19.05 | 30.26,12.7 31.62,11.33 31.62,9.52 32.64,8.51 35.94,8.51 40.52,3.93 U1.P$22 | 30.26,12.7 R28.1 | 30.26,12.7 v31.24,12.7 | U4.2 v71.51,46.73 v71.5,46.74
  Bottom 0.305: v71.5,52.45 v71.5,46.74 71.5,43.1 70.71,42.31 v70.09,42.31 69.83,42.05 63.64,42.05 51.69,30.1 v49.28,30.1 49.15,29.97 v18.03,29.97 12.57,24.51 v12.57,19.05 | v31.24,12.7 29.34,10.8 22.35,10.8 v14.1,19.05
SCLK
  Top 0.305: U7.P$4 83.89,47.17 83.89,48.03 80.79,51.13 75.33,51.13 74.81,50.61 IC15.11
SDA  (via drill 0.35)
  Top 0.305: IC9.4 47.67,29.08 49.15,29.08 v49.28,29.21 | v72.01,53.21 73.77,53.21 IC15.15 | v70.13,41.47 v70.12,41.47 IC11.15 | v17.71,28.9 17.59,29.02 IC4.4 | IC12.4 12.51,18.1 v12.57,18.16 | U1.P$21 37.98,5.71 35.69,8 31.99,8 29.7,10.29 R27.1 v30.86,10.29 | U4.1 72.06,47.23 v72.03,47.26
  Bottom 0.305: v72.01,53.21 72.01,52.69 72.03,52.67 v72.03,47.26 72.03,42.82 70.68,41.47 v70.13,41.47 70.07,41.53 63.75,41.53 51.44,29.21 v49.28,29.21 49.15,29.08 17.89,29.08 v17.71,28.9 13.27,24.45 13.27,18.85 v12.57,18.16 14.35,18.16 22.23,10.29 v30.86,10.29
SDATA
  Top 0.305: U7.P$3 82.05,51.56 75.13,51.56 74.81,51.24 IC15.12
SEL  (via drill 0.35)
  Top 0.305: U1.P$32 65.92,3.42 52.58,16.76 v28.32,16.76 | v25.65,26.42 R29.1
  Bottom 0.305: v25.65,26.42 28.32,23.75 v28.32,16.76
SEL0
  Top 0.305: S1.9 30.87,36.51 31.77,36.51 32.89,37.64 32.89,50.23 35.33,52.66 63.56,52.66 64.39,51.84 64.39,45.97 65.72,44.64 IC11.10
SEL1  (via drill 0.35)
  Top 0.305: S1.3 v27.94,35.94 | v32.13,37.85 32.13,50.17 35.18,53.21 63.75,53.21 65.02,51.94 65.02,46.1 65.85,45.28 IC11.9
  Bottom 0.305: v32.13,37.85 30.23,35.94 v27.94,35.94
SEL2
  Top 0.305: S2.9 70.6,36.44 71.74,37.58 71.74,43.04 72.71,44 IC11.6
SEL3  (via drill 0.35)
  Top 0.305: S2.3 v60.07,35.94 | IC11.7 73.89,44.7 75.06,44.7 75.82,43.94 75.82,37.74 73.89,35.81 v65.53,35.81
  Bottom 0.305: v60.07,35.94 65.41,35.94 v65.53,35.81
TRIG  (via drill 0.35)
  Top 0.305: U1.P$34 71,6.09 68.96,8.13 v64.39,8.13 | v56.13,8 39.5,8 v39.37,8.13 | v32.89,2.16 31.88,1.14 10.92,1.14 10.67,1.4 v10.67,3.18 | R31.2 v6.35,16.51
  Bottom 0.305: v39.37,8.13 39.37,3.81 37.72,2.16 v32.89,2.16 | v10.67,3.18 10.92,3.43 10.92,11.94 v6.35,16.51 | v64.39,8.13 64.26,8 v56.13,8
VIN
  Top 0.305: IC16.1 24.31,27.93 23.49,27.11 23.49,25.15 | 23.49,25.15 23.49,24.61 22.68,23.8 U3.6 | R32.1 23.46,25.18 23.49,25.15
VINA
  Top 0.305: C8.1 5.52,29.22 D3.1 5.95,29.18 R11.2 9.11,28.19 18.8,28.19 19.56,28.96 IC16.7
VINB
  Top 0.305: R23.2 39.9,29.42 D6.1 35.37,29.42 C17.1 34.34,28.39 27.62,28.39 27.46,28.55 27.46,29.31 25.4,31.37 21.6,31.37 20.45,30.23 20.45,29.69 20.69,29.46 IC16.6
VREF  (via drill 0.35)
  Top 0.305: v26.04,12.19 26.04,9.4 27.43,8 28.08,8 29.92,6.16 U5.1 31.68,6.16 U5.4 | v24.64,22.61 U3.3
  Bottom 0.305: v26.04,12.19 25.65,12.19 24.89,12.95 24.89,22.35 v24.64,22.61
WR  (via drill 0.35)
  Top 0.152: U1.P$26 v50.68,4.95
  Top 0.305: U1.P$26
  Bottom 0.152: J4.11 71.85,32.44 77.01,27.27 77.01,12.59 68.92,4.5 51.13,4.5 v50.68,4.95
X+  (via drill 0.35)
  Top 0.305: U4.13 82.17,46.23 82.53,45.87 v82.55,45.87
  Bottom 0.305: J4.3 79.65,36.44 80.91,37.69 80.91,44.2 82.55,45.85 v82.55,45.87
X-  (via drill 0.35)
  Top 0.305: U4.16 80.38,50.15 v80.39,50.17
  Bottom 0.305: v80.39,50.17 80.37,50.19 79.65,50.19 78.74,49.28 79.93,48.08 79.93,38.07 79.3,37.44 J4.1
Y+  (via drill 0.35)
  Top 0.305: U4.14 82.27,46.73 v82.42,46.89
  Bottom 0.305: J4.4 79.76,35.94 81.34,37.51 81.34,44 82.68,45.34 83.19,45.34 83.19,46.12 v82.42,46.89
Y-  (via drill 0.35)
  Top 0.305: U4.17 79.88,49.25 v79.84,49.28
  Bottom 0.305: J4.2 79.42,36.94 80.37,37.89 80.37,48.75 v79.84,49.28

## Text on the board
SilkscreenBottom: OsPi Pico